# EAGLE board QueenOfSpades (EAGLE 9.7.0)
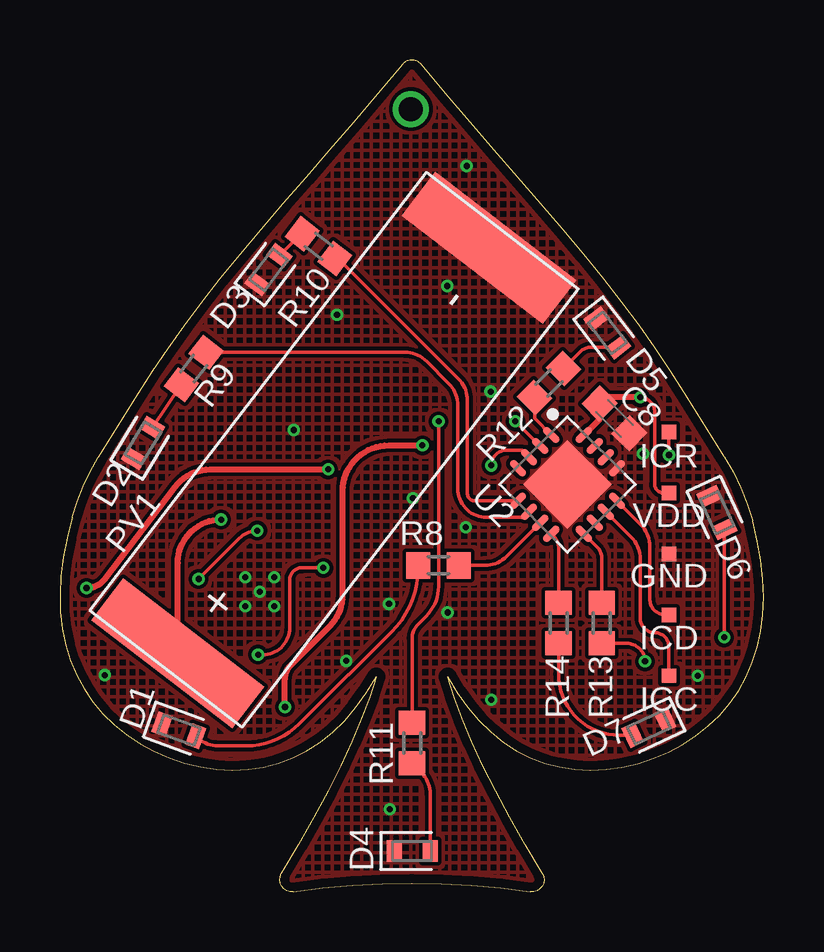
[diagram p0: board, top side]
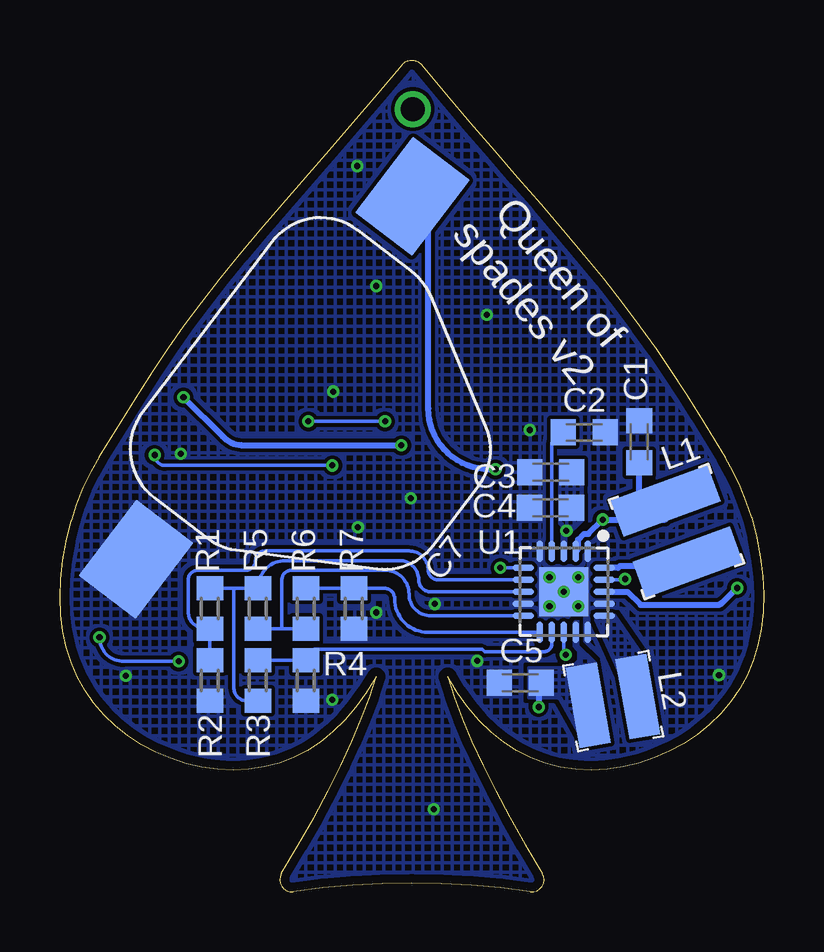
[diagram p1: board, bottom side, seen from below]

Size 29.32 x 34.65 mm. Coordinates in mm from the lower left corner, seen from the top.
Outline: 9.72,0 10.95,0.15 12.19,0.25 13.42,0.32 14.66,0.34 15.89,0.32 17.13,0.25 18.37,0.15 19.6,0 19.74,0 19.88,0.04 19.99,0.12 20.09,0.22 20.15,0.35 20.17,0.49 20.15,0.63 20.1,0.75 19.39,1.95 18.74,3.1 18.15,4.2 17.63,5.25 17.16,6.25 16.76,7.2 16.42,8.1 16.15,8.95 16.55,8.29 16.99,7.68 17.45,7.13 17.95,6.65 18.47,6.23 19.02,5.87 19.59,5.58 20.19,5.35 20.81,5.19 21.45,5.09 22.1,5.06 22.75,5.09 23.41,5.18 24.07,5.34 24.71,5.55 25.33,5.81 25.93,6.13 26.49,6.49 27.01,6.9 27.48,7.35 27.9,7.85 28.28,8.38 28.59,8.94 28.85,9.55 29.06,10.18 29.2,10.84 29.29,11.54 29.32,12.27 29.29,13.02 29.2,13.8 29.06,14.61 28.86,15.44 28.64,16.14 28.37,16.83 28.05,17.49 27.68,18.13 26.58,19.89 26.01,20.79 25.42,21.71 24.8,22.64 24.13,23.59 23.42,24.56 22.65,25.55 21.82,26.56 20.95,27.6 20.03,28.67 19.08,29.76 18.1,30.89 17.1,32.05 16.08,33.24 15.04,34.47 arc100 14.28,34.47 13.24,33.24 12.22,32.04 11.22,30.88 10.24,29.75 9.29,28.65 8.37,27.58 7.5,26.54 6.67,25.53 5.89,24.54 5.16,23.56 4.49,22.61 3.85,21.68 3.26,20.76 2.69,19.86 1.6,18.09 1.26,17.5 0.97,16.88 0.72,16.25 0.51,15.6 0.29,14.75 0.14,13.94 0.04,13.15 0,12.38 0.02,11.65 0.1,10.95 0.24,10.27 0.43,9.63 0.69,9.02 1,8.45 1.37,7.91 1.79,7.41 2.26,6.95 2.78,6.53 3.33,6.16 3.93,5.84 4.55,5.57 5.2,5.35 5.86,5.19 6.52,5.09 7.18,5.06 7.84,5.09 8.48,5.18 9.1,5.34 9.7,5.57 10.28,5.86 10.84,6.22 11.36,6.64 11.86,7.12 12.33,7.67 12.77,8.28 13.17,8.95 12.9,8.1 12.56,7.2 12.16,6.25 11.69,5.25 11.17,4.2 10.58,3.1 9.93,1.95 9.22,0.75 9.17,0.63 9.15,0.49 9.17,0.35 9.23,0.22 9.33,0.12 9.44,0.04 9.58,0 9.72,0
Copper layers (1*16): Top 0.035559375mm / dielectric 1.6mm / Bottom 0.035559375mm
Design rules "oshpark-2layer *": minimum track width 6mil, minimum drill 10mil, track to track 6mil, track to pad 6mil, pad to pad 6mil, via to via 6mil, smd to smd 6mil, copper to edge 15mil, drill to drill 6mil, minimum pad ring 5mil, minimum via ring 5mil, stop-mask expansion 1.5mil, vias tented up to drill 11mil, thermal gap 10mil

## Footprints (pad centres in the part's own frame; a part is rotated, then mirrored left to right if it is on the bottom)
C0603K = smd 1.05 x 1.08: 1 -0.875,0; 2 0.875,0
MAL219691153E2 = smd 4 x 3: + 9.5,3.5; - -9.5,3.5
LEDC1608X35N = smd 0.612 x 0.912: A 0.75,0; C -0.75,0
TP06SQ = smd 0.6 x 0.6: TP 0,0
WE744031220 = smd 1.6 x 4.3: P$1 -1.35,0; P$2 1.35,0
WE74438335100 = smd 1.3 x 3.4: P$1 -1.05,0; P$2 1.05,0
KXOB25 = smd 2.2 x 7.4: + 10.7,0 | smd 2.3 x 7.4: - -10.6,0
R0603 = smd 1 x 1.1: 1 -0.85,0; 2 0.85,0
QFN50P350X350X90-21T205N = smd 0.896 x 0.264: 1 -1.687,1; 2 -1.687,0.5; 3 -1.687,0; 4 -1.687,-0.5; 5 -1.687,-1; 11 1.687,-1; 12 1.687,-0.5; 13 1.687,0; 14 1.687,0.5; 15 1.687,1 | smd 0.264 x 0.896: 6 -1,-1.687; 7 -0.5,-1.687; 8 0,-1.687; 9 0.5,-1.687; 10 1,-1.687; 16 1,1.687; 17 0.5,1.687; 18 0,1.687; 19 -0.5,1.687; 20 -1,1.687 | smd 2.05 x 2.05: 21 0,0
QFN65P400X400X50-17T260N = smd 0.837 x 0.32: 1 -1.937,0.975; 2 -1.937,0.325; 3 -1.937,-0.325; 4 -1.937,-0.975; 9 1.937,-0.975; 10 1.937,-0.325; 11 1.937,0.325; 12 1.937,0.975 | smd 0.32 x 0.837: 5 -0.975,-1.937; 6 -0.325,-1.937; 7 0.325,-1.937; 8 0.975,-1.937; 13 0.975,1.937; 14 0.325,1.937; 15 -0.325,1.937; 16 -0.975,1.937 | smd 2.6 x 2.6: 17 0,0

## Placement (x,y rotation side)
C1  10uF  [C0603K]  5.18,18.74 90 bottom
C2  10nF  [C0603K]  7.47,19.13 0 bottom
C3  10nF  [C0603K]  8.87,17.47 180 bottom
C4  4.7uF  [C0603K]  8.88,15.99 180 bottom
C5  22uF  [C0603K]  10.15,8.7 180 bottom
C7  MAL21969115MAL219691153E2  [MAL219691153E2]  17.61,19.28 52.7 bottom
C8  100nF  [C0603K]  23.1,19.71 315 top
D1  CHIP-FLAT-R_0603-0.35MM  [LEDC1608X35N]  4.95,6.73 340 top
D2  CHIP-FLAT-R_0603-0.35MM  [LEDC1608X35N]  3.46,18.69 59 top
D3  CHIP-FLAT-R_0603-0.35MM  [LEDC1608X35N]  8.69,25.91 52.5 top
D4  CHIP-FLAT-R_0603-0.35MM  [LEDC1608X35N]  14.67,1.69 0 top
D5  CHIP-FLAT-R_0603-0.35MM  [LEDC1608X35N]  22.81,23.28 307.5 top
D6  CHIP-FLAT-R_0603-0.35MM  [LEDC1608X35N]  27.37,15.79 295 top
D7  CHIP-FLAT-R_0603-0.35MM  [LEDC1608X35N]  24.54,6.83 205 top
GND  TPTP06SQ  [TP06SQ]  25.37,14.07 0 top
ICC  TPTP06SQ  [TP06SQ]  25.37,8.99 0 top
ICD  TPTP06SQ  [TP06SQ]  25.37,11.53 0 top
ICR  TPTP06SQ  [TP06SQ]  25.37,19.15 0 top
L1  WE744031220  [WE744031220]  3.63,15 290 bottom
L2  WE74438335100  [WE74438335100]  6.27,7.94 190 bottom
PV1  KXOB25  [KXOB25]  11.42,18.41 232.5 top
R1  [R0603]  23.07,11.79 90 bottom
R2  [R0603]  23.07,8.79 90 bottom
R3  [R0603]  21.07,8.79 270 bottom
R4  [R0603]  19.07,8.79 90 bottom
R5  [R0603]  21.07,11.79 90 bottom
R6  [R0603]  19.07,11.79 270 bottom
R7  [R0603]  17.07,11.79 90 bottom
R8  [R0603]  15.77,13.59 0 top
R9  [R0603]  5.57,21.79 52.5 top
R10  [R0603]  10.77,26.89 322.5 top
R11  [R0603]  14.67,6.19 90 top
R12  [R0603]  20.37,21.19 225 top
R13  [R0603]  22.57,11.19 90 top
R14  [R0603]  20.77,11.19 90 top
U1  BQ25570  [QFN50P350X350X90-21T205N]  8.32,12.49 270 bottom
U2  PIC16(L)F1X32X  [QFN65P400X400X50-17T260N]  21.14,16.96 315 top
VDD  TPTP06SQ  [TP06SQ]  25.37,16.61 0 top

## Library data of the parts
C1-C5 C8 = rcl; SPICEPREFIX: C
C7 L1 L2 PV1 U1 U2 = BQ25570
D1-D7 = LED; CATEGORY: LED; COLOR: RED; DESCRIPTION: CHIP LED FLAT; SUB-CATEGORY: CHIP; TYPE: FLAT_TOP
GND ICC ICD ICR VDD = testpad
R1-R14 = rcl; SPICEPREFIX: R

## Nets
GND: C1.2 C2.2 C3.2 C4.2 C5.2 C7.- C8.2 D1.C D2.C D3.C D4.C D5.C D6.C D7.C GND.TP PV1.- R2.1 R4.1 R7.1 U1.1 U1.5 U1.9 U1.15 U1.17 U1.21 U2.13 U2.17
LN1: R8.2 U2.7
LN2: R9.2 U2.6
LN3: R10.2 U2.5
LN4: R11.2 U2.2
LN5: R12.2 U2.1
LN6: R13.2 U2.9
LN7: R14.2 U2.8
N$1: L1.P$2 U1.20
N$2: C1.1 L1.P$1 PV1.+ U1.2
N$3: C2.1 U1.4
N$4: L2.P$1 U1.16
N$5: C3.1 C4.1 U1.3 U1.19
N$6: U1.6 U1.13
N$7: C5.1 C8.1 L2.P$2 U1.14 U2.16 VDD.TP
N$8: C7.+ U1.18
N$10: R1.1 R2.2 U1.7
N$11: R5.1 R6.2 U1.10
N$12: R3.1 R4.2 U1.12
N$13: R6.1 R7.2 U1.11
N$14: ICR.TP U2.3
N$15: ICD.TP U2.12
N$16: ICC.TP U2.11
N$17: D1.A R8.1
N$18: D2.A R9.1
N$19: D3.A R10.1
N$20: D4.A R11.1
N$21: D5.A R12.1
N$22: D6.A R13.1
N$23: D7.A R14.1
VRDRV: R1.2 R3.2 R5.2 U1.8

## Tracks (layer width: path | path; a pad name or v marks a point on that pad's centre or on a via)
GND  (via drill 0.25 pad 0.51)
  other vias: 8.32,12.49 17.97,7.99 7.72,11.89 7.72,13.09 8.92,13.09 8.92,11.89 1.86,9.02 16.94,30.23 26.57,8.99 9.74,19.23 16.14,25.23 17.94,20.83 11.54,24.03 24.29,18.24 11.93,9.61 13.71,11.98 16.15,11.63 13.74,3.43 14.71,16.38 16.91,15.18
  pour Bottom (rank 3, no thermals, hatched): 0.05,0.07 29.9,0.07 29.9,34.91 0.05,34.91
  pour Top (rank 3, no thermals, hatched): 0.18,0.32 30.15,0.32 30.15,35.17 0.18,35.17
LN1
  Top 0.152: R8.2 17.71,13.59 arc45 18.61,13.96 U2.7
LN2
  Top 0.152: R9.2 14.37,22.47 arc-45 15.27,22.09 16.2,21.16 arc-45 16.57,20.27 16.57,16.79 arc90 17.77,15.59 19.31,15.59 U2.6
LN3
  Top 0.152: R10.2 11.59,26.37 16.6,21.36 arc-45 16.97,20.47 16.97,16.59 arc90 17.28,16.28 U2.5
LN4  (via drill 0.25 pad 0.51)
  Top 0.152: U2.2 v18.98,19.59 v18.97,19.59 | v15.77,19.59 15.77,12.72 arc-45 15.26,11.48 14.91,11.12 arc45 14.67,10.57 R11.2
  Bottom 0.152: v18.97,19.59 v15.77,19.59
LN5
  Top 0.152: U2.1 19.77,19.71 R12.2
LN6
  Top 0.152: U2.9 22.39,14.34 arc-45 22.57,13.89 R13.2
LN7
  Top 0.152: U2.8 20.59,14.78 arc-45 20.77,14.33 R14.2
N$1
  Bottom 0.254: U1.20 6.06,13.49 6,13.56 3.34,13.56 L1.P$2
N$2  (via drill 0.25 pad 0.51)
  Top 0.254: PV1.+ 4.91,13.7 arc-90 v6.71,15.5
  Bottom 0.254: U1.2 7.74,14.27 7.74,14.67 7.49,14.91 7.31,14.91 v6.71,15.5 4.09,15.5 L1.P$1 5.18,16.27 C1.1
N$3
  Bottom 0.152: U1.4 8.82,18.66 arc90 C2.1
N$4
  Bottom 0.254: L2.P$1 5.15,8.02
  pour Bottom (no thermals, hatched): 5.03,6.67 5.5,6.67 5.5,7.98 5.5,7.98 5.5,7.99 5.5,8.01 5.5,8.01 5.5,8.01 5.5,8.02 5.51,8.04 5.51,8.04 7,11.33 7,11.51 6.21,11.51 5.03,9.83
N$5  (via drill 0.25 pad 0.51)
  Top 0.152: v5.77,13.02 7.48,14.73 arc-45 v8.22,15.04
  Bottom 0.152: v5.77,13.02 5.81,12.99 U1.19
  pour Bottom (no thermals, hatched): 8.24,14.78 8.25,14.75 8.25,13.87 8.4,13.87 8.4,15.21 8.41,15.23 8.5,15.32 8.5,17.91 7.55,17.91 7.55,15.46 7.56,15.46
N$6  (via drill 0.25 pad 0.51)
  Top 0.152: v8.25,9.87 8.45,9.87 arc90 9.57,10.99 9.57,12.99 arc-90 10.07,13.49 v10.97,13.49
  Bottom 0.152: U1.13 8.32,9.97 arc-90 8.22,9.87 arc-90 8.23,9.87 arc-90 v8.25,9.87 | v10.97,13.49 U1.6
N$7  (via drill 0.25 pad 0.51)
  Top 0.152: v24.17,20.59 arc-90 24.77,19.99 24.77,16.99 arc90 25.15,16.61 VDD.TP
  Top 0.254: v9.37,7.69 9.37,8.87 arc-45 9.61,9.42 11.26,11.08 arc45 11.77,12.32 11.77,16.67 arc-90 13.7,18.59 v15.1,18.59 | U2.16 22.48,19.68 C8.1 22.74,20.59 v24.17,20.59
  Bottom 0.254: C5.1 arc-90 9.37,8.6 v9.37,7.69 | v15.1,18.59 21.65,18.59 arc45 22.55,18.96 v24.17,20.59
  pour Bottom (no thermals, hatched): 7.75,10.28 7.74,10.25 7.05,9.56 6.93,8.71 7.51,6.28 8.51,8.02 8.51,8.03 8.51,8.04 8.52,8.04 8.52,8.05 8.53,8.06 8.54,8.06 8.54,8.06 8.55,8.06 8.56,8.07 8.56,8.07 8.57,8.07 8.58,8.07 9.8,8.07 9.8,9.31 8.19,9.31 8.18,9.31 8.17,9.31 8.16,9.31 8.16,9.32 8.11,9.32 8.1,9.32 8.09,9.33 8.09,9.33 8.08,9.33 8.03,9.35 8.02,9.36 8.01,9.36 8.01,9.36 8,9.37 7.96,9.4 7.96,9.4 7.95,9.41 7.94,9.41 7.94,9.42 7.71,9.65 7.7,9.68 7.7,9.88 7.7,9.88 7.7,9.89 7.7,9.9 7.7,9.91 7.71,9.96 7.71,9.97 7.71,9.97 7.71,9.98 7.71,9.99 7.74,10.04 7.74,10.05 7.74,10.05 7.74,10.06 7.75,10.06 7.78,10.1 7.78,10.11 7.79,10.12 7.8,10.12 7.8,10.13 7.9,10.22 7.9,11.15 7.89,11.19 7.88,11.22 7.86,11.25 7.84,11.27 7.81,11.28 7.77,11.29 7.75,11.28
N$8  (via drill 0.25 pad 0.51)
  Top 0.254: v1.1,12.65 v1.11,12.65 arc52 1.87,13.02 4.8,16.87 arc-53 6.26,17.59 v11.17,17.59
  Bottom 0.254: U1.18 5.67,12.49 5.13,11.94 1.93,11.94 arc-45 1.75,12.02 1.12,12.65 v1.1,12.65 | v11.17,17.59 11.43,17.59 arc90 13.97,20.13 13.97,28.3 C7.+
N$9  (via drill 1)
  other vias: 14.62,32.6
N$10
  Bottom 0.152: R2.2 R1.1 arc-90 23.12,10.99 23.32,10.99 arc90 23.97,11.65 23.97,12.99 arc90 23.57,13.39 21.57,13.39 arc-90 21.17,13.79 arc90 20.77,14.19 14.77,14.19 arc90 13.97,13.39 arc-90 13.57,12.99 U1.7
N$11
  Bottom 0.152: R5.1 20.07,10.94 | 20.07,10.94 R6.2 | 20.07,10.94 20.07,12.99 arc90 19.67,13.39 15.77,13.39 arc90 14.77,12.39 arc-90 13.87,11.49 U1.10
N$12
  Bottom 0.152: U1.12 8.82,10.34 arc90 9.17,9.99 11.63,9.99 11.73,10.09 18.72,10.09 19.17,9.64 | R3.1 19.17,9.64 | 19.17,9.64 R4.2
N$13
  Bottom 0.152: R6.1 R7.2 15.82,12.64 arc90 15.37,12.19 arc-90 13.99,10.8 U1.11
N$14  (via drill 0.25 pad 0.51)
  Top 0.152: v17.97,17.76 arc-90 18.61,18.39 19.26,18.39 U2.3 | ICR.TP v25.37,18.19
  Bottom 0.152: v17.97,17.76 24.94,17.76 arc90 v25.37,18.19
N$15
  Top 0.152: ICD.TP 25.23,11.53 arc-90 24.57,12.19 24.57,14.39 arc45 24.2,15.28 U2.12
N$16
  Top 0.152: U2.11 23.8,14.76 arc-45 24.17,13.87 24.17,11.39 arc90 24.77,10.79 arc-90 25.37,10.19 ICC.TP
N$17
  Top 0.152: D1.A 5.69,6.44 arc45 6.59,6.07 7.76,6.07 arc45 9.97,6.98 12.01,9.03 12.03,9.03 13.81,10.81 arc45 14.92,13.5 R8.1
N$18
  Top 0.152: R9.1 D2.A
N$19
  Top 0.152: R10.1 10.05,27.41 D3.A
N$20
  Top 0.152: R11.1 15.05,4.96 arc-45 15.42,4.07 D4.A
N$21
  Top 0.152: D5.A 22.13,22.68 arc45 21.68,22.5 R12.1
N$22  (via drill 0.25 pad 0.51)
  Top 0.152: R13.1 23.62,10.34 arc-90 v24.37,9.59 | D6.A 27.67,15.09 v27.67,10.59
  Bottom 0.152: v24.37,9.59 26.67,9.59 arc90 v27.67,10.59
N$23
  Top 0.152: R14.1 20.77,9.06 arc90 23.31,6.52 D7.A
VRDRV
  Bottom 0.152: 21.97,12.64 R1.2 | 21.97,12.64 R5.2 arc90 19.92,13.79 15.17,13.79 arc90 14.37,12.99 arc-90 13.87,12.49 U1.8 | R3.2 21.52,7.94 arc90 22.07,8.49 22.07,12.54 arc90 21.97,12.64

## Text on the board
bNames: Queen of / spades v2